# Altium PCB 6C-2L-1550um.PcbDoc
Units mm, origin at the board's own origin, x right, y up, seen from the top; angles counter-clockwise.
Board outline 9.1 x 9.6 mm, 2 copper layers (Top Layer, Bottom Layer), stack 1.586 mm thick; 1 components, 2 nets, 16 pads, 6 vias.
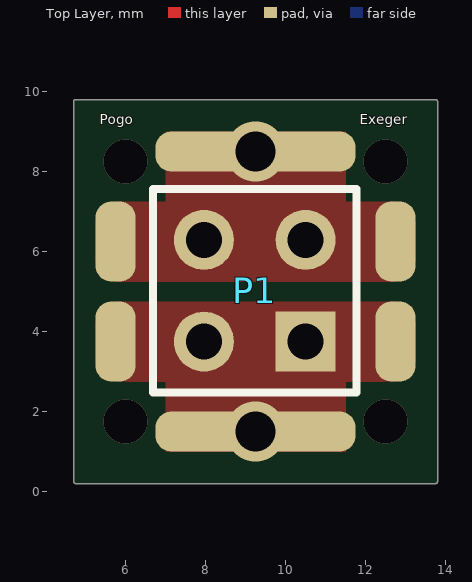
[diagram p0: Top Layer view]
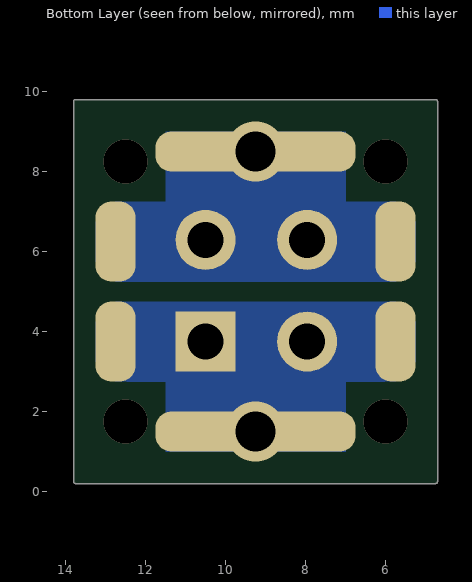
[diagram p1: Bottom Layer view, seen from below]

## Layer stack, top to bottom
Top Solder: solder mask 0.0102, Solder Resist, Dk 3.5
Top Layer: signal copper 0.018
Dielectric1: core 1.55, FR-4, Dk 4.8
Bottom Layer: signal copper 0.018
Bottom Solder: solder mask 0.0102, Solder Resist, Dk 3.5

## Board outline
4.7,0.25 4.7,9.75 cw(c4.75,9.75) 4.75,9.8 13.75,9.8 cw(c13.75,9.75) 13.8,9.75 13.8,0.25 cw(c13.75,0.25) 13.75,0.2 4.75,0.2 cw(c4.75,0.25)

## Design rules (kind name [scope] priority, off if disabled: settings)
BoardOutlineClearance [All] p1: gap=0.25 ignorepadtopadclearanceinfootprint=FALSE except(0: Arc-SplitContinuation Track-SplitContinuation SMDPad-SplitContinuation THPad-SplitContinuation Via-SplitContinuation Fill-SplitContinuation Poly-SplitContinuation Region-SplitContinuation Text-SplitContinuation)
Clearance Clearance-xPP-xTP-xTT [All] p1: gap=0.15 ignorepadtopadclearanceinfootprint=FALSE except(0: Arc-Hole Track-Hole SMDPad-Hole THPad-Hole Via-Hole Fill-Hole Poly-Hole Region-Hole Text-Hole)
ComponentClearance [All] p1: gap=0.25 collisioncheckmode=3 verticalgap=0.25 showdistances=FALSE
DiffPairsRouting [All] p1: maxlimit=0.25 minlimit=0.25 mostfreqgap=0.25 toplayer_minwidth=0.381 toplayer_maxwidth=0.381 toplayer_prefwidth=0.381 bottomlayer_minwidth=0.381 bottomlayer_maxwidth=0.381 bottomlayer_prefwidth=0.381 maxuncoupledlength=12.5
Height [All] p1: minheight=0 maxheight=25 prefheight=12.5
HoleSize HoleSize-PTH [All] p1: absolutevalues=TRUE maxlimit=2 minlimit=0.25 maxpercent=80.000 minpercent=20.000
HoleToHoleClearance [All] p1: gap=0.35 allowstackedmicrovias=TRUE
MinimumAnnularRing "Minimum IAR  >0.45mm" [((ObjectKind = 'Pad') OR (ObjectKind = 'Via')) And (Layer = 'MultiLayer') And (HoleDiameter > AsMM(0.45))] p1: minimumring=0.175 // minimum inner annular ring for pads > 0.45mm finished hole size
MinimumAnnularRing "Minimum IAR <=0.45mm" [((ObjectKind = 'Pad') OR (ObjectKind = 'Via')) And (Layer = 'MultiLayer') And (HoleDiameter <= AsMM(0.45))] p2: minimumring=0.175 // minimum inner annular ring for pads <= 0.45mm finished hole size
MinimumSolderMaskSliver [All] p1: minsoldermaskwidth=0.08
PlaneClearance PlaneClearance-IPI [All] p1: clearance=0.25
PlaneConnect [All] p1: planeconnectstyle=Relief reliefexpansion=0.175 reliefentries=4 reliefconductorwidth=0.2 reliefairgap=0.2
PolygonConnect PolygonConnect-xTW [All] p1: connectstyle=Direct reliefconductorwidth=0.2 reliefentries=4 polygonreliefangle="90 Angle" airgapwidth=0.2
RoutingCorners [All] p1: cornerstyle=45-Degree minsetback=2.5 maxsetback=2.5
RoutingVias "RoutingVias > 0.45mm" [(ObjectKind = 'Via') And (HoleDiameter > AsMM(0.45))] p1: holewidth=0.5 width=0.85 viastyle="Through Hole" minholewidth=0.5 minwidth=0.85 maxholewidth=0.9 maxwidth=1.25 // finishet hole size > 0.45mm
RoutingVias "RoutingVias <= 0.45mm" [(ObjectKind = 'Via') And (HoleDiameter <= AsMM(0.45))] p2: holewidth=0.3 width=0.65 viastyle="Through Hole" minholewidth=0.25 minwidth=0.6 maxholewidth=0.45 maxwidth=0.8 // finishet hole size <= 0.45mm
SilkToSilkClearance [All] p1: silktosilkclearance=0.2
SilkToSolderMaskClearance SilkscreenOverComponentPads [IsPad] p1: minsilkscreentomaskgap=0.2 clearancetoexposedcopper=TRUE
SolderMaskExpansion [All] p1: expansion=0 istentingtop=FALSE
UnRoutedNet [All] p1: checkbadconnections=TRUE
Width Width-xTW [All] p1: maxlimit=1.5 minlimit=0.15 preferedwidth=0.2
18 further rules are at their usual default settings.

## Components (designator, comment, footprint, x,y, rotation, side; value= is the part's Value field where it differs from the comment)
P1 "Header 2X2" HDR2X2 10.5,3.75 r90 top

## Footprints (in the part's own frame and the unit in brackets; to place one, negate y for a bottom-side part, rotate by r counter-clockwise, add the part's x,y. Pads: shape width x height; smd on the part's side, far side on the other; paste and mask are expansions set on the pad)
HDR2X2 [mm] "Connector; Header; 2x2 Position"
  rect 1.5x1.5 hole 0.9: 1(0,0)
  round 1.5 hole 0.9: 2(0,2.54) 3(2.54,0) 4(2.54,2.54)
  silkscreen extent -1.27,-1.27 3.81,3.81

## Part data
P1: "Header, 2-Pin, Dual row", LatestRevisionDate=17-Jul-2002, LatestRevisionNote="Re-released for DXP Platform.", Publisher="Altium Limited"

## Free pads (board coordinates)
  rrect80% 1x2 smd mask+0.05: 1(5.75,6.25) 1(12.75,6.25) 2(5.75,3.75) 2(12.75,3.75)
  rrect80% 1x2 smd far side mask+0.05: 1(5.75,6.25) 1(12.75,6.25) 2(5.75,3.75) 2(12.75,3.75)
  rrect80% 5x1 smd mask+0.05: 1(9.25,8.5) 2(9.25,1.5)
  rrect80% 5x1 smd far side mask+0.05: 1(9.25,8.5) 2(9.25,1.5)

## Via types
v1: diameter 1.1, hole 1.1, Top Layer to Bottom Layer, 4 vias
v2: diameter 1.5, hole 1, Top Layer to Bottom Layer, 2 vias

## Nets (pads, with @x,y where several pads share a name; then routed paths per layer and width w, separated by ;. In a path a pad name is that pad's centre, name@x,y a point inside that pad or via, vN(x,y) a via of type N, cw(c..) or ccw(c..) an arc to the next point about the centre after c; other vN are vias at no path point)
N1: P1.3 P1.4 pad.1
  other v2: 9.25,8.5
P1: P1.1 P1.2 pad.2
  other v2: 9.25,1.5
copper on no net:
  other v1: 6,1.75 12.5,1.75 6,8.25 12.5,8.25

## Polygon pours and split planes (outlines as drawn)
P1 on Top Layer "P1_L01_P012" (solid, pour order 12): 9.75,4.75 9.75,2.75 12.75,2.75 13.25,3.25 13.25,4.25 12.75,4.75
P1 on Top Layer "P1_L01_P011" (solid, pour order 11): 8.75,4.75 5.75,4.75 5.25,4.25 5.25,3.25 5.75,2.75 8.75,2.75
N1 on Top Layer "N1_L01_P009" (solid, pour order 9): 8.75,5.25 5.75,5.25 5.25,5.75 5.25,6.75 5.75,7.25 8.75,7.25
N1 on Top Layer "N1_L01_P010" (solid, pour order 10): 9.75,7.25 9.75,5.25 12.75,5.25 13.25,5.75 13.25,6.75 12.75,7.25
P1 on Top Layer "P1_L01_P002" (solid, pour order 2): 11.5,4.75 7,4.75 7,1 11.5,1
N1 on Top Layer "N1_L01_P000" (solid, pour order 0): 11.5,9 7,9 7,5.25 11.5,5.25
P1 on Bottom Layer "P1_L02_P013" (solid, pour order 13): 8.75,4.75 5.75,4.75 5.25,4.25 5.25,3.25 5.75,2.75 8.75,2.75
P1 on Bottom Layer "P1_L02_P014" (solid, pour order 14): 9.75,4.75 9.75,2.75 12.75,2.75 13.25,3.25 13.25,4.25 12.75,4.75
N1 on Bottom Layer "N1_L02_P008" (solid, pour order 8): 9.75,7.25 9.75,5.25 12.75,5.25 13.25,5.75 13.25,6.75 12.75,7.25
N1 on Bottom Layer "N1_L02_P007" (solid, pour order 7): 8.75,5.25 5.75,5.25 5.25,5.75 5.25,6.75 5.75,7.25 8.75,7.25
N1 on Bottom Layer "N1_L02_P006" (solid, pour order 6): 7,9 11.5,9 11.5,5.25 7,5.25
P1 on Bottom Layer "P1_L02_P003" (solid, pour order 3): 11.5,4.75 7,4.75 7,1 11.5,1

## Silkscreen, mask and mechanical layers (free items; w line width, h text height)
Top Overlay:
  text "Pogo" at 5.35,9.183 h0.25
  text "Exeger" at 11.85,9.183 h0.25
Dimensions:
  lines w0.1: 13.75,3.25 13.75,6.25 13.75,7.5 13.75,9.75 4.75,9.75 4.75,7.5 4.75,6.5 4.75,3.5 4.75,2.5 4.75,0.25 12.5,0.25 13.75,0.25 13.75,2.5 13.75,3.5